# Allegro board 2019-08-16-s.brd
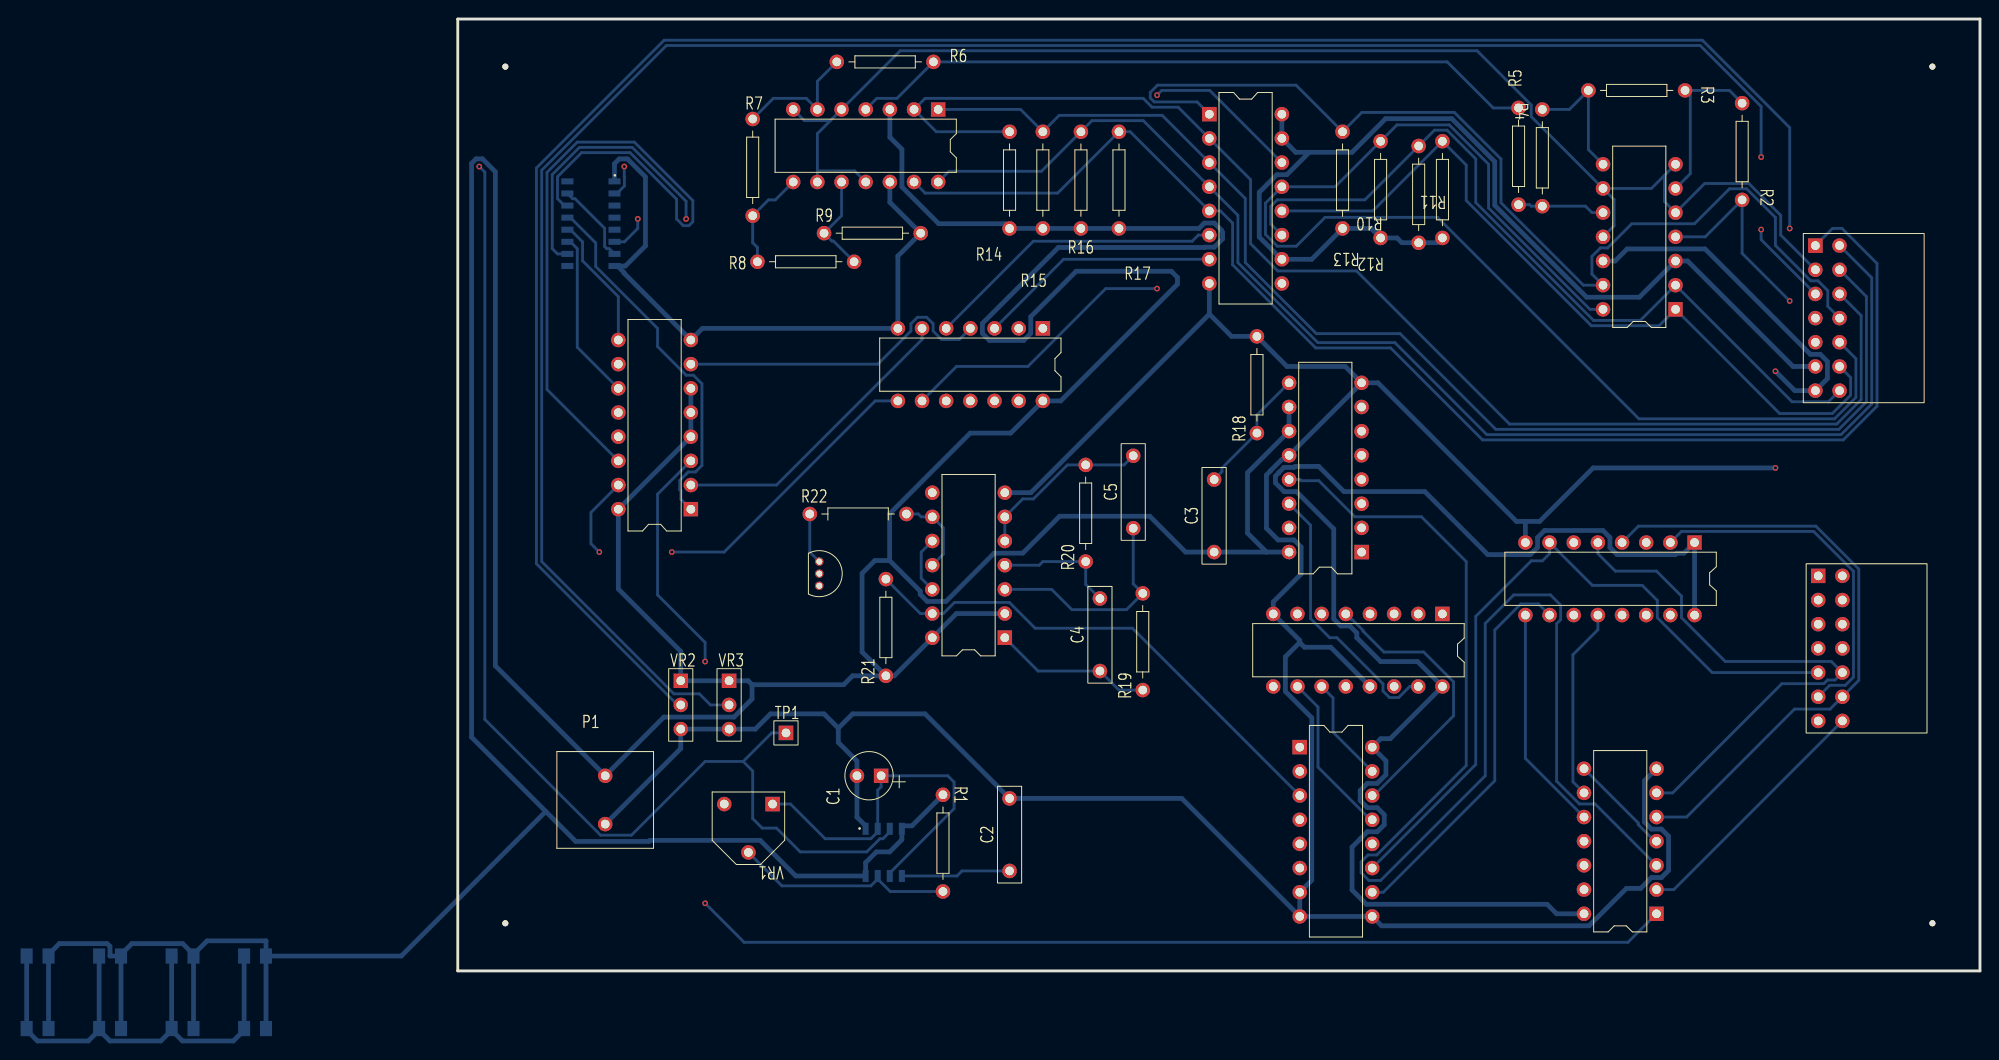
[diagram p0: board, top side]
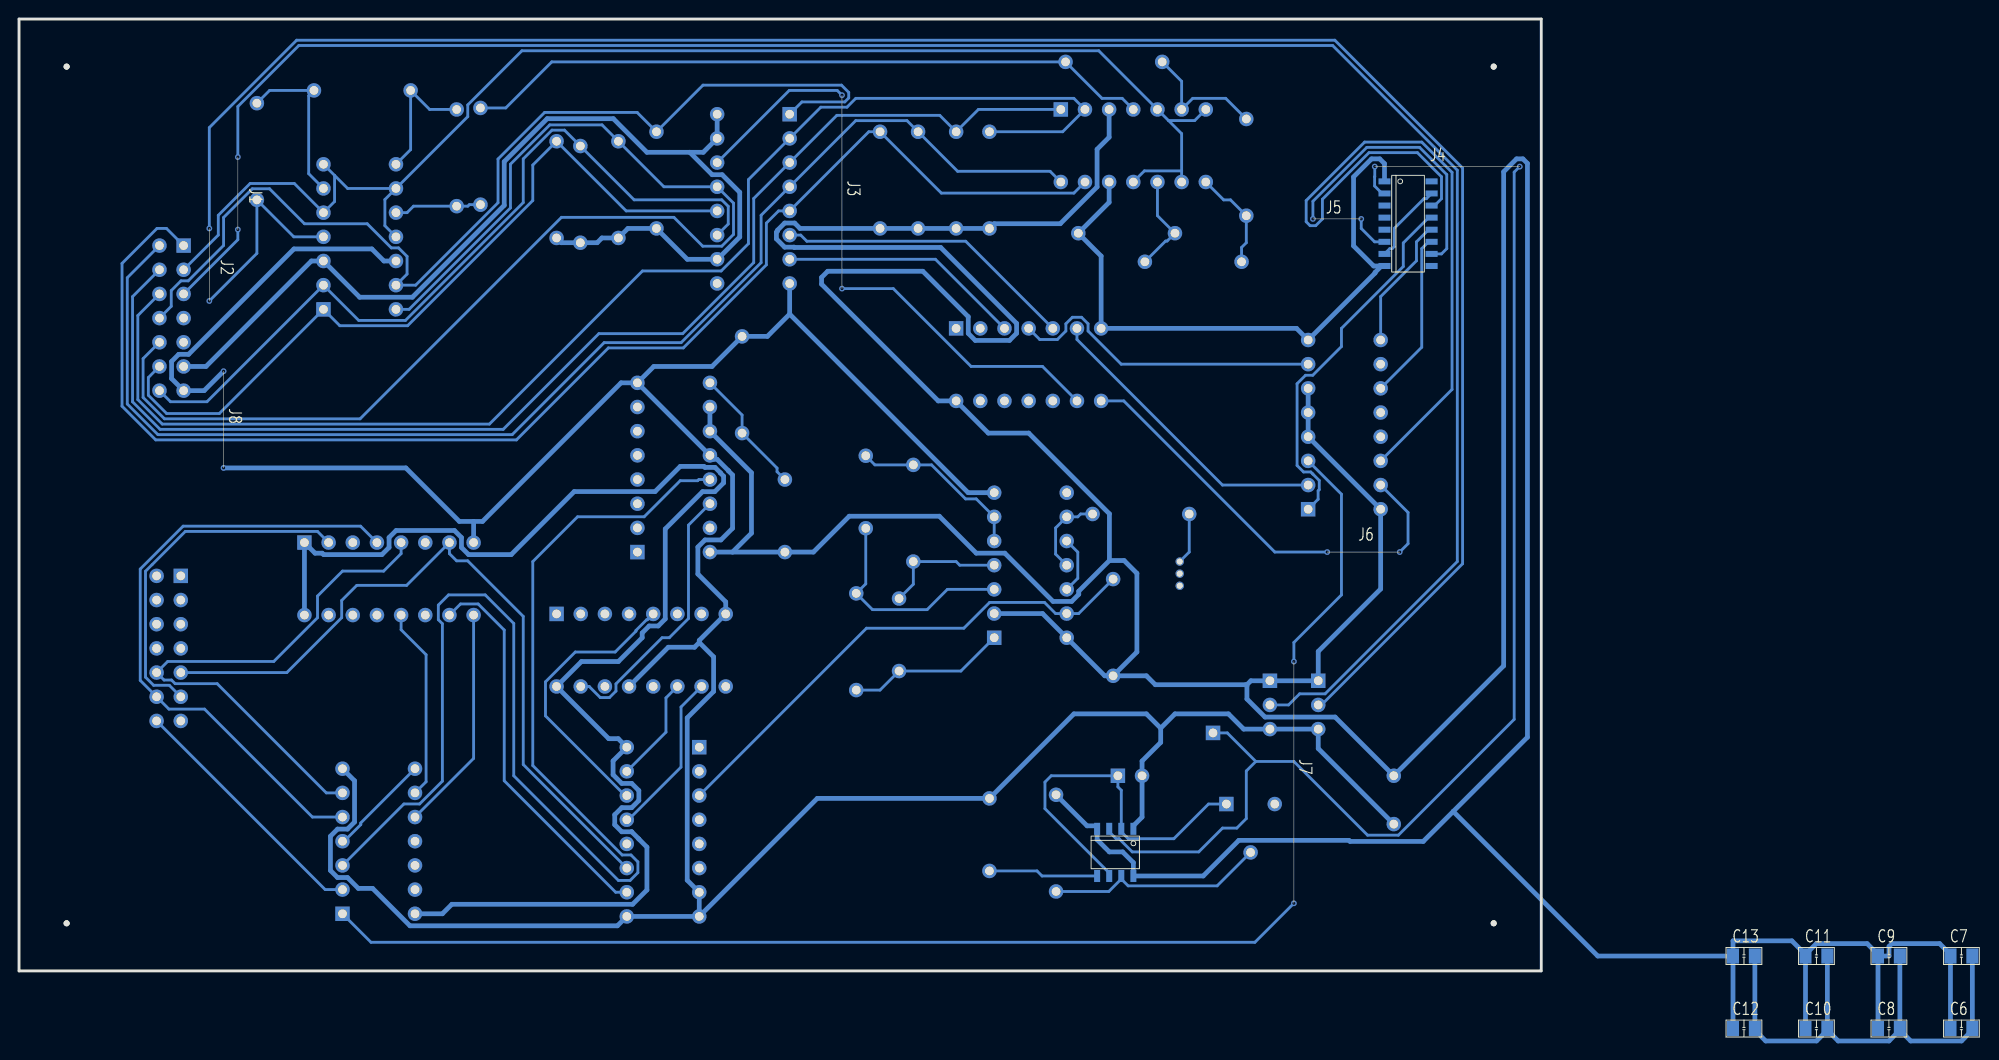
[diagram p1: board, bottom side, seen from below]

Outline 160 x 100 mm; copper layers: TOP, BOTTOM. Coordinates in mm from the lower left corner of the outline.
Outline path: 0,100 0,0 160,0 160,100 0,100

## Design rules (mm)
nets with their own width: min track width 0.5; nets +5V GND

## Placement (name value [footprint] x y rotation side)
C1  10uF  [CAP196]  44.5 20.5 90 top
C2  0.1uF  [CAP300]  58 10.5 90 top
C3  0.1uF  [CAP300]  79.5 44 90 top
C4  0.1uF  [CAP300]  67.5 31.5 90 top
C5  0.1uF  [CAP300]  71 46.5 90 top
C6  0.1uF  [SMDCAP]  -43.16 -6.06 180 bottom
C7  0.1uF  [SMDCAP]  -43.16 1.56 180 bottom
C8  0.1uF  [SMDCAP]  -35.54 -6.06 180 bottom
C9  0.1uF  [SMDCAP]  -35.54 1.56 180 bottom
C10  0.1uF  [SMDCAP]  -27.92 -6.06 180 bottom
C11  0.1uF  [SMDCAP]  -27.92 1.56 180 bottom
C12  0.1uF  [SMDCAP]  -20.3 -6.06 180 bottom
C13  0.1uF  [SMDCAP]  -20.3 1.56 180 bottom
J1  -  [J2]  137 85.5 270 bottom
J2  -  [J2]  140 78 270 bottom
J3  -  [J7]  73.5 92 270 bottom
J4  -  [J5]  17.5 84.5 180 bottom
J5  -  [J1]  24 79 180 bottom
J6  -  [J2]  22.5 44 180 bottom
J7  -  [J9]  26 32.5 270 bottom
J8  -  [J3]  138.5 63 270 bottom
NOREF  -  [unnamed]  5 5 0 top
NOREF#2  -  [unnamed]  5 95 0 top
NOREF#3  -  [unnamed]  155 5 0 top
NOREF#4  -  [unnamed]  155 95 0 top
P1  CON2  [2P]  15.5 20.5 0 top
P2  CON14  [JUMPER14]  142.7 76.2 270 top
P3  CON14  [JUMPER14]  143 41.5 270 top
Q1  2SC1815  [TO92]  38 43 0 top
R1  10K  [RES400]  51 18.5 270 top
R2  10K  [RES400]  135 81 90 top
R3  10K  [RES400]  129 92.5 180 top
R4  10K  [RES400]  114 90.5 270 top
R5  10K  [RES400]  111.5 80.5 90 top
R6  10K  [RES400]  50 95.5 180 top
R7  10K  [RES400]  31 89.5 270 top
R8  10K  [RES400]  31.5 74.5 0 top
R9  10K  [RES400]  38.5 77.5 0 top
R10  10K  [RES400]  101 76.5 90 top
R11  10K  [RES400]  103.5 77 90 top
R12  10K  [RES400]  97 77 90 top
R13  10K  [RES400]  93 78 90 top
R14  10K  [RES400]  58 78 90 top
R15  10K  [RES400]  61.5 78 90 top
R16  10K  [RES400]  65.5 78 90 top
R17  10K  [RES400]  69.5 78 90 top
R18  10K  [RES400]  84 56.5 90 top
R19  10K  [RES400]  72 29.5 90 top
R20  10K  [RES400]  66 43 90 top
R21  10K  [RES400]  45 31 90 top
R22  10K  [RES400]  37 48 0 top
TP1  TP  [JUMPER1]  34.5 25 0 top
U1  NE555  [SOIC8]  44.78 12.45 270 bottom
U2  LM339  [DIP14_3]  128 69.5 180 top
U3  LM339  [DIP14_3]  50.5 90.5 270 top
U4  40147  [DIP16_3]  79 90 0 top
U5  4069  [DIP14_3]  61.5 67.5 270 top
U6  4518  [SOIC16]  14 78.5 180 bottom
U7  4585  [DIP16_3]  24.5 48.5 180 top
U8  4027  [DIP16_3]  95 44 180 top
U9  4071  [DIP14_3]  126 6 180 top
U10  4001  [DIP14_3]  57.5 35 180 top
U11  4017  [DIP16_3]  103.5 37.5 270 top
U12  4051  [DIP16_3]  88.5 23.5 0 top
U13  4175  [DIP16_3]  130 45 270 top
VR1  1M  [VR1]  33.09 17.53 180 top
VR2  10K  [VR2]  23.44 27.94 0 top
VR3  10K  [VR2]  28.52 27.94 0 top

## Library data of the parts
C1 = Cap POL
C2-C5 = Cap NP
C6-C13 = Cap TEXT
J1-J8 = JUMPER
P1 = CON2
P2 P3 = CON14
Q1 = 2SC1815
R1-R22 = resistor
TP1 = TP
U1 = NE555: Tolerance: ***; User Part Number: ***
U2 U3 = LM339: Tolerance: ***; User Part Number: ***
U4 = 40147: Tolerance: ***; User Part Number: ***
U5 = 4069: Tolerance: ***; User Part Number: ***
U6 = 4518: Tolerance: ***; User Part Number: ***
U7 = 4585: Tolerance: ***; User Part Number: ***
U8 = 4027: Tolerance: ***; User Part Number: ***
U9 = 4071: Tolerance: ***; User Part Number: ***
U10 = 4001: Tolerance: ***; User Part Number: ***
U11 = 4017: Tolerance: ***; User Part Number: ***
U12 = 4051: Tolerance: ***; User Part Number: ***
U13 = 4175: Tolerance: ***; User Part Number: ***
VR1 = VR1
VR2 VR3 = VR2_0

## Footprints (pads in the part's own frame, mm; a bottom-side part is the same pattern mirrored in y, then rotated)
2P
  round 1.524 hole 0.914: 1(0,0) 2(0,-5.08)
CAP196
  rect 1.524x1.524 hole 0.914: 1(0,0)
  round 1.524 hole 0.914: 2(0,2.54)
CAP300
  round 1.524 hole 0.914: 1(0,0) 2(7.62,0)
DIP14_3
  rect 1.524x1.524 hole 0.914: 1(0,0)
  round 1.524 hole 0.914: 2(0,-2.54) 3(0,-5.08) 4(0,-7.62) 5(0,-10.16) 6(0,-12.7) 7(0,-15.24) 8(7.62,-15.24) 9(7.62,-12.7) 10(7.62,-10.16) 11(7.62,-7.62) 12(7.62,-5.08) 13(7.62,-2.54) 14(7.62,0)
DIP16_3
  rect 1.524x1.524 hole 0.914: 1(0,0)
  round 1.524 hole 0.914: 2(0,-2.54) 3(0,-5.08) 4(0,-7.62) 5(0,-10.16) 6(0,-12.7) 7(0,-15.24) 8(0,-17.78) 9(7.62,-17.78) 10(7.62,-15.24) 11(7.62,-12.7) 12(7.62,-10.16) 13(7.62,-7.62) 14(7.62,-5.08) 15(7.62,-2.54) 16(7.62,0)
JUMPER1
  rect 1.524x1.524 hole 0.914: 1(0,0)
JUMPER14
  rect 1.524x1.524 hole 0.914: 1(0,0)
  round 1.524 hole 0.914: 2(0,2.54) 3(2.54,0) 4(2.54,2.54) 5(5.08,0) 6(5.08,2.54) 7(7.62,0) 8(7.62,2.54) 9(10.16,0) 10(10.16,2.54) 11(12.7,0) 12(12.7,2.54) 13(15.24,0) 14(15.24,2.54)
RES400
  round 1.524 hole 0.914: 1(0,0) 2(10.16,0)
SMDCAP
  rect 1.27x1.6 smd: 1(-0.15,0) 2(2.15,0)
SOIC8
  rect 1.27x0.635 smd: 1(-2.477,1.905) 2(-2.477,0.635) 3(-2.477,-0.635) 4(-2.477,-1.905) 5(2.477,-1.905) 6(2.477,-0.635) 7(2.477,0.635) 8(2.477,1.905)
SOIC16
  rect 1.27x0.635 smd: 1(-2.477,4.445) 2(-2.477,3.175) 3(-2.477,1.905) 4(-2.477,0.635) 5(-2.477,-0.635) 6(-2.477,-1.905) 7(-2.477,-3.175) 8(-2.477,-4.445) 9(2.477,-4.445) 10(2.477,-3.175) 11(2.477,-1.905) 12(2.477,-0.635) 13(2.477,0.635) 14(2.477,1.905) 15(2.477,3.175) 16(2.477,4.445)
TO92
  round 0.889 hole 0.635: 1(0,0) 2(0,-1.27) 3(0,-2.54)
unnamed
  round 0.635 hole 3.175 unplated: (0,0)
VR1
  rect 1.524x1.524 hole 0.914: 1(0,0)
  round 1.524 hole 0.914: 2(2.54,5.08) 3(5.08,0)
VR2
  rect 1.524x1.524 hole 0.914: 1(0,2.54)
  round 1.524 hole 0.914: 2(0,0) 3(0,-2.54)

## Nets
+5V: C3.1 C6.1 C7.1 C8.1 C9.1 C10.1 C11.1 C12.1 C13.1 P1.1 P2.11 R1.1 R10.1 R11.1 R12.1 R13.1 R14.1 R15.1 R16.1 R17.1 R21.1 U1.4(RST) U1.8(VCC) U2.3 U3.3 U4.10(I\9\) U4.15(I\0\) U4.16(VCC) U5.14 U6.16 U7.4(A>BIN) U7.5(A<BIN) U7.6(A=BIN) U7.16(VCC) U8.10(J) U8.11(K) U8.16 U9.14 U10.2(I1) U10.14 U11.16(VCC) U12.16(VCC) U13.1(R\S\T\) U13.16(VCC) VR2.1(A) VR3.1(A)
GND: C1.2 C2.2 C6.2 C7.2 C8.2 C9.2 C10.2 C11.2 C12.2 C13.2 P1.2 P2.13 R9.2 R18.2 U1.1(GND) U2.12 U3.12 U4.8(GND) U5.7 U6.1(CLK) U6.8 U6.9(CLK) U7.8(GND) U8.8 U8.12(RST) U9.7 U10.7 U11.8(GND) U11.13(C\K\E\N\) U12.7(VEE) U12.8(GND) U12.9(C) U13.8(GND) VR2.3(WIPER) VR3.3(WIPER)
ADC0: P2.14 R10.2 U2.2(OUT) U4.11(I\1\)
ADC1: P2.12 R11.2 U2.1(OUT) U4.12(I\2\)
ADC2: P2.10 R12.2 U2.14(OUT) U4.13(I\3\)
ADC3: P2.8 R13.2 U2.13(OUT) U4.1(I\4\)
ADC4: P2.6 R14.2 U3.2(OUT) U4.2(I\5\)
ADC5: P2.4 R15.2 U3.1(OUT) U4.3(I\6\)
ADC6: P2.2 R16.2 U3.14(OUT) U4.4(I\7\)
ADC7: P2.1 R17.2 U3.13(OUT) U4.5(I\8\)
CLK: TP1.1 U1.3(OUT) U6.2(EN)
MOTOR-GND: P3.6 Q1.2(C)
MR: U6.7(CLR) U6.15(CLR) U8.14(Q\) U11.15(RST) U12.6(E\N\)
MR2: P3.13 U8.15(Q)
SW1: P3.14 U9.2(I1)
SW2: P3.12 U9.5(I0) U13.4(D0)
SW3: P3.10 U9.6(I1) U13.5(D1)
SW4: P3.8 U9.9(I1) U13.12(D2)
SWLED1: P3.11 U13.2(Q0)
SWLED2: P3.9 U12.11(A) U13.7(Q1)
SWLED3: P3.7 U12.10(B) U13.10(Q2)
VR3: P2.5 VR3.2(B)
VR-LED: P2.3 U2.5(+IN) U2.7(+IN) U2.9(+IN) U2.11(+IN) U3.5(+IN) U3.7(+IN) U3.9(+IN) U3.11(+IN)
N01821: R1.2 U1.7(DISC) VR1.2
N01825: C1.1 U1.2(TRIG) U1.6(THR) VR1.1
N01879: R2.2 R3.1 U2.6(-IN)
N01886: R2.1 U2.4(-IN) VR2.2(B)
N01929: R3.2 R4.1 U2.8(-IN)
N02004: R4.2 R5.1 U2.10(-IN)
N02079: R5.2 R6.1 U3.4(-IN)
N02154: R6.2 R7.1 U3.6(-IN)
N02229: R7.2 R8.1 U3.8(-IN)
N02304: R8.2 R9.1 U3.10(-IN)
N05133: U4.9(A\) U5.1(I)
N05160: U4.7(B\) U5.3(I)
N05172: U4.6(C\) U5.5(I)
N05184: U4.14(D\) U5.9(I)
N05202: U5.2(O) U7.10(A0)
N05214: U5.4(O) U7.7(A1)
N05226: U5.6(O) U7.2(A2)
N05238: U5.8(O) U7.15(A3)
N05506: U6.6(Q3) U6.10(EN)
N05615: U6.11(Q0) U7.11(B0)
N05627: U6.12(Q1) U7.9(B1)
N05639: U6.13(Q2) U7.1(B2)
N05651: U6.14(Q3) U7.14(B3)
N05837: C2.1 U1.5(CV)
N06039: U7.3(A=BOUT) U9.1(I0)
N06118: U8.13(CLK) U9.3(O)
N06347: C3.2 R18.1 U8.9(SET)
N12761: Q1.1(E) R22.1
N12765: Q1.3(B)
N12791: R22.2 U10.9(I1) U10.11(O)
N12870: U10.10(O) U10.12(I0)
N12949: R21.2 U10.13(I1) U12.3(X)
N13065: U9.4(O) U9.8(I0)
N13106: U9.10(O) U13.9(CLK)
N16220: U10.8(I0) U11.3(0)
N16266: U11.10(4) U12.13(X0)
N16278: U11.5(6) U12.14(X1)
N16290: U11.11(9) U12.15(X2)
N16648: C5.1 R19.2 U10.3(O)
N16662: C5.2 R20.2 U10.5(I0) U10.6(I1)
N16697: C4.1 R19.1 U10.1(I0)
N16721: C4.2 R20.1 U10.4(O) U11.14(CLK)

Pads without a net: P2 7 9; P3 1 2 3 4 5; U5 10 11 12 13; U6 3 4 5; U7 12 13; U8 1 2 3 4 5 6 7; U9 11 12 13; U11 1 2 4 6 7 9 12; U12 1 2 4 5 12; U13 3 6 11 13 14 15; VR1 3

## Via types
v1: diameter 0.61, hole 0.33, TOP to BOTTOM, 16 vias

## Routing (per net, layer and track width the routed paths; a pad name or vN(x,y) marks a point on that pad's centre or on a via; arc(x,y) is an arc through that point)
+5V: length 870.6
  BOTTOM w0.5: U7.6 U7.5 U7.4 U7.16 16.88,40.12 23.44,33.56 VR2.1 VR3.1 30.52,30.48 31,30 ; 9.25,16.75 12.4,13.6 20.1,13.6 20.21,13.71 31.79,13.71 35.53,9.97 U1.8 42.87,11.37 44,12.5 45.4,12.5 46.68,13.78 46.68,15.24 47.74,15.24 R1.1 ; 9.25,16.75 1.45,24.55 1.45,84.84 1.92,85.31 2.6,85.31 3.95,83.95 3.95,32.05 P1.1 21.67,26.67 29.04,26.67 30.94,28.56 30.94,29.94 31,30 ; 9.25,16.75 -5.94,1.56 C13.1 ; C9.1 -36.55,1.56 -36.55,2.57 -36.85,2.86 -41.88,2.86 -43.01,1.73 C7.1 C6.1 ; C9.1 C8.1 ; C9.1 -35.39,1.73 -34.26,2.86 -28.91,2.86 -27.77,1.73 ; U13.16 U13.1 128.88,43.88 128.13,43.88 127.98,43.73 121.86,43.73 121.11,44.48 121.11,45.52 120.36,46.27 114.24,46.27 113.49,45.52 113.49,44.48 112.74,43.73 108.27,43.73 101.65,50.35 93.15,50.35 90.5,53 88.01,53 87.9,52.89 86.84,52.89 86.27,52.33 86.27,52.3 85.94,51.97 85.94,51.27 86.86,50.35 88.15,50.35 92.07,46.43 92.07,36.98 92.82,36.23 93.77,36.23 94.5,35.5 94.5,35 97,32.5 100.88,32.5 U11.16 98.02,24.4 97.02,24.4 U12.16 97.56,22.06 97.56,20.61 96.64,19.69 95.6,19.69 94.85,18.94 94.85,17.9 95.6,17.15 96.64,17.15 97.39,16.4 97.39,15.36 96.64,14.61 95.61,14.61 95.61,14.61 95.6,14.61 94.85,13.86 94.85,13.85 94,13 94,8.5 95.51,6.99 114.51,6.99 115.5,6 U9.14 ; -27.77,1.73 C11.1 C10.1 ; -27.77,1.73 -26.35,3.15 -20.15,3.15 C13.1 ; 31,30 31.06,30.06 40.56,30.06 41.5,31 R21.1 ; C13.1 C12.1 ; P2.11 140.35,63.5 129.27,74.58 U2.3 124.19,70.77 118.65,70.77 109,80.43 109,85.02 104.48,89.53 97.53,89.53 94,86 89.5,86 ; 89.5,86 87.15,83.65 86.1,83.65 84.25,81.8 84.25,77.1 86.59,74.76 U4.10 89.76,74.76 R13.1 96,78 R12.1 98.73,77 99.23,76.5 R10.1 103,76.5 R11.1 ; 89.5,86 88.08,86 U4.15 U4.16 ; R21.1 42.5,33.5 42.5,41.77 43.84,43.11 45.39,43.11 ; R21.1 45.88,31 U10.14 52.42,37.54 U10.2 ; 85,44 C3.1 76.5,44 72.73,47.77 63.27,47.77 59.39,43.89 56.39,43.89 51.31,38.81 49.36,38.81 48.61,39.56 48.61,39.89 45.39,43.11 ; 85,44 83.01,45.99 83.01,52.33 U8.11 U8.10 ; 85,44 U8.16 ; U3.3 45.42,87.58 46.69,86.31 46.69,82.36 50.55,78.5 57.5,78.5 R14.1 R15.1 R16.1 R17.1 77.91,78 78.48,78.57 79.52,78.57 80.27,77.82 80.27,77.73 80.39,77.61 80.39,76.9 79.52,76.03 78.53,76.03 78.5,76 63.12,76 55.15,68.02 55.15,66.98 55.9,66.23 59.48,66.23 60.23,66.98 60.23,68.73 65,73.5 75,73.5 75.65,72.85 75.65,72.15 63.38,59.88 U5.14 58.12,56.5 53.87,56.5 45.39,48.02 45.39,43.11
GND: length 500.6
  BOTTOM w0.5: C11.2 C10.2 -30.07,-6.23 ; v1(138.5,52.84) 119.34,52.84 113.72,47.22 112.22,47.22 ; 40,25.5 38.5,27 32.88,27 31.28,25.4 VR3.3 VR2.3 23.44,23.36 P1.2 ; 40,25.5 41.5,27 49.12,27 C2.2 76.1,18.12 U12.8 ; 40,25.5 40,24 41.96,22.04 C1.2 41.96,16.15 42.87,15.24 U1.1 ; U12.8 U12.7 89.77,9.53 89.77,26.58 86.99,29.36 86.99,32.99 88.5,34.5 ; U12.8 U12.9 97.11,4.73 118.9,4.73 122.84,8.66 124.33,8.66 125.48,9.81 126.52,9.81 127.27,10.55 127.27,14.14 126.52,14.89 125.48,14.89 124.73,15.64 124.73,19.97 U9.7 ; U6.8 16.79,74.06 ; 16.79,74.06 17.62,74.06 19.73,76.17 19.73,83.42 17.84,85.31 16.98,85.31 16.48,84.81 U6.1 ; 16.79,74.06 17.47,73.38 17.47,73.31 U7.8 25.72,67.5 U5.7 46.26,75.1 R9.2 45.42,80.74 U3.12 ; U2.12 121.65,74.58 122.91,75.85 131.1,75.85 142.18,64.77 143.22,64.77 143.97,64.02 143.97,62.23 P2.13 140.54,60.96 v1(138.5,63) ; 88.5,34.5 89,34 91.76,34 U11.13 ; 88.5,34.5 88.5,34.72 U11.8 85.72,38.77 88.65,41.69 88.65,44.52 87.9,45.27 86.23,45.27 85,46.5 85,52.1 85.43,52.53 85.43,52.55 86.63,53.75 86.97,53.75 U8.12 U8.8 ; 79,69 81.34,66.66 R18.2 87.16,63.5 93.28,63.5 U8.8 ; 79,69 60.24,50.24 U10.7 ; 79,69 U4.8 ; 112.22,47.22 U13.8 ; 112.22,47.22 111.28,47.22 96.72,61.78 U8.8 ; -30.07,-6.23 -31.21,-7.36 -36.55,-7.36 -37.69,-6.23 ; -30.07,-6.23 -28.93,-7.36 -23.59,-7.36 -22.45,-6.23 C12.2 C13.2 ; -37.69,-6.23 C8.2 C9.2 ; -37.69,-6.23 -38.83,-7.36 -44.17,-7.36 -45.31,-6.23 C6.2 C7.2
ADC0: length 84.7
  BOTTOM w0.3: U4.11 85.45,78.47 85.45,80.32 86.14,81.01 95.35,81.01 R10.2 102.67,88.33 103.98,88.33 107,85.31 107,80.72 119.38,68.33 124.29,68.33 U2.2 140.25,59.79 144.07,59.79 P2.14
ADC1: length 82.6
  BOTTOM w0.3: U4.12 96.18,79.84 R11.2 106,84.66 106,80.93 119.15,67.78 126.28,67.78 U2.1 138.95,58.55 144.48,58.55 146.41,60.48 146.41,62.33 P2.12
ADC2: length 132.9
  BOTTOM w0.3: P2.10 146.96,64.32 146.96,60.25 144.71,58 124.15,58 102.98,79.17 91.17,79.17 88.13,76.13 86.14,76.13 84.9,77.37 84.9,80.66 U4.13 92.22,82.38 R12.2 98.72,88.88 104.21,88.88 108.35,84.75 108.35,80.16 119,69.5 U2.14
ADC3: length 109.3
  BOTTOM w0.3: P2.8 144,69.82 144,71.47 142.97,72.49 142.22,72.49 138.5,76.21 138.5,79.15 135.48,82.17 133.67,82.17 129.99,78.49 123.4,78.49 120.86,75.95 120.11,75.95 119.21,75.06 119.21,73.21 U2.13 118.31,72.04 109.65,80.7 109.65,85.29 104.75,90.19 95.03,90.19 R13.2 88.11,93.05 73.55,93.05 72.79,92.29 72.79,91.71 73.21,91.29 77.71,91.29 U4.1
ADC4: length 142.3
  BOTTOM w0.3: P2.6 147.51,68.85 147.51,60.02 144.94,57.45 110.55,57.45 94.47,73.53 86.2,73.53 83.33,76.4 83.33,83.13 U4.2 75.72,90.74 72.98,90.74 72.05,91.67 49.13,91.67 U3.2 50.3,88.16 R14.2
ADC5: length 133.1
  BOTTOM w0.3: P2.4 148.07,70.83 148.07,59.79 145.17,56.89 109.11,56.89 99.05,66.95 90.25,66.95 82.78,74.41 82.78,81.14 U4.3 74.04,89.88 63.22,89.88 R15.2 59.16,90.5 U3.1
ADC6: length 136.7
  BOTTOM w0.3: P2.2 148.62,72.82 148.62,59.56 145.4,56.34 108.16,56.34 98.5,66 90.41,66 82,74.41 82,79.38 U4.4 72.05,89.33 66.67,89.33 R16.2 61.34,84 51.62,84 U3.14
ADC7: length 145.6
  BOTTOM w0.3: U3.13 49.13,81.71 63.05,81.71 R17.2 70.68,88.16 U4.5 80.17,79.84 81.45,78.56 81.45,74.18 90.18,65.45 98.05,65.45 107.72,55.78 145.63,55.78 149.18,59.33 149.18,74.32 145.5,78 144.5,78 P2.1
CLK: length 126.3
  BOTTOM w0.3: TP1.1 33,25 30,22 ; U1.3 45.41,14.61 44.69,13.88 44.37,13.88 42.99,12.5 36,12.5 33.5,15 32,15 31,16 31,21 30,22 ; v1(17.5,84.5) 17.5,83.45 17.52,83.43 17.52,82.46 16.73,81.67 U6.2 ; v1(2.26,84.5) 2.85,83.91 2.85,26.43 15.02,14.25 18.25,14.25 26,22 30,22
MR: length 37.4
  BOTTOM w0.3: U8.14 89.63,46.83 89.63,37.02 91.65,35 92.41,35 97.25,30.16 97.25,29.4 97.94,28.71 98.9,28.71 100.07,29.88 U11.15 ; U6.7 15.93,75.87 15.67,75.87 15.44,76.11 15.44,78.01 12.33,81.13 12.07,81.13 U6.15
SW1: length 26.9
  BOTTOM w0.3: U9.2 127.82,8.54 P3.14
SW2: length 66.4
  BOTTOM w0.3: U9.5 129.16,16.16 140.5,27.5 144.24,27.5 P3.12 147.26,30.52 147.26,42.21 142.75,46.72 124.1,46.72 U13.4
SW3: length 58.1
  BOTTOM w0.3: U9.6 127.7,18.7 139.17,30.17 143.59,30.17 143.97,30.55 144.75,30.55 P3.10 144.37,32.51 133.22,32.51 128.63,37.1 128.63,39.37 126,42 121.67,42 119.84,43.83 U13.5
SW4: length 20.3
  BOTTOM w0.3: U13.12 119.84,35.84 117.21,33.21 117.21,19.87 U9.9
SWLED1: length 37.1
  BOTTOM w0.3: P3.11 144.2,30 145.85,30 146.71,30.86 146.71,41.98 146.02,42.67 142.52,46.17 128.63,46.17 U13.2
SWLED2: length 77.6
  BOTTOM w0.3: P3.9 131.85,31.34 126.09,37.1 126.09,38.91 124.5,40.5 119.26,40.5 U13.7 114.76,43.83 114.01,43.08 112.84,43.08 107,37.24 107,21.68 U12.11
SWLED3: length 40.9
  BOTTOM w0.3: U12.10 97.29,8.26 109,19.97 109,35.81 111.74,38.55 113.59,38.55 U13.10
VR3: length 217.7
  BOTTOM w0.3: v1(137,85.5) 137,90.81 130.59,97.22 21.92,97.22 8.82,84.12 8.82,43 22.72,29.11 25.39,29.11 26.56,27.94 VR3.2 ; v1(137,77.88) 137,76.82 P2.5
VR-LED: length 148
  BOTTOM w0.3: P2.3 139.05,77.31 139.05,79.38 135.71,82.72 131.06,82.72 U2.5 126.83,80.83 126.83,83.57 ; U2.9 125.46,82.2 126.83,83.57 ; U2.9 112.83,89.75 112.83,90.97 107.14,96.67 46.51,96.67 U3.5 39.17,89.33 ; U2.9 121.55,81.03 121.55,78.29 U2.11 ; 126.83,83.57 U2.7 ; 39.17,89.33 36.43,89.33 U3.7 ; 39.17,89.33 37.8,87.96 37.8,84.05 ; U3.11 41.71,84.05 37.8,84.05 ; 37.8,84.05 U3.9
N01821: length 23.1
  BOTTOM w0.3: R1.2 45.45,8.34 44.14,9.65 ; 44.14,9.65 44.14,9.97 ; 44.14,9.65 43.42,8.93 34.07,8.93 VR1.2
N01825: length 39.5
  BOTTOM w0.3: U1.6 45.41,10.29 52.17,17.04 52.17,19.83 51.5,20.5 C1.1 44.5,19.33 44.14,18.98 44.14,14.61 43.42,13.88 38.62,13.88 34.97,17.53 VR1.1
N01879: length 17.7
  BOTTOM w0.3: U2.6 129.55,83.75 129.55,91.95 R3.1 133.66,92.5 R2.2
N01886: length 235.9
  BOTTOM w0.3: VR2.2 23.1,27.94 8.27,42.77 8.27,84.35 21.69,97.77 130.82,97.77 140,88.59 v1(140,78) ; U2.4 131.12,77.12 R2.1 135,75.38 v1(140,70.38)
N01929: length 14.1
  BOTTOM w0.3: R4.1 116.84,90.5 R3.2 118.84,86.28 U2.8
N02004: length 9.2
  BOTTOM w0.3: R5.1 112.67,80.5 112.83,80.34 R4.2 118.53,80.34 119.21,79.66 U2.10
N02079: length 72.7
  BOTTOM w0.3: U3.4 44.05,91.67 46.17,91.67 R6.1 104,95.5 108.84,90.66 R5.2
N02154: length 14
  BOTTOM w0.3: R7.1 33.17,91.67 36.63,91.67 U3.6 37.8,93.46 R6.2
N02229: length 10.8
  BOTTOM w0.3: U3.8 33.38,81 32.66,81 R7.2 31,76.5 31.5,76 R8.1
N02304: length 10.5
  BOTTOM w0.3: U3.10 40.34,79.34 R9.1 39.32,76.68 39.48,76.68 R8.2
N05160: length 25.6
  BOTTOM w0.3: U4.7 63.68,74.76 U5.3
N05172: length 31.7
  BOTTOM w0.3: U4.6 77.83,77.3 77.19,76.65 60.49,76.65 U5.5
N05184: length 46.1
  BOTTOM w0.3: v1(73.5,92) 74,92.5 79.04,92.5 U4.14 ; U5.9 52.42,63.5 59.92,63.5 68.1,71.68 v1(73.5,71.68)
N05214: length 33.8
  BOTTOM w0.3: U5.4 52.71,66.33 50.86,66.33 49.97,67.22 49.97,67.98 49.28,68.67 48.32,68.67 47.63,67.98 47.63,67.22 44.15,63.74 U7.7
N05226: length 31.8
  BOTTOM w0.3: U7.2 33.51,51.04 48.8,66.33 U5.6
N05238: length 38.9
  BOTTOM w0.3: v1(22.5,44) 28,44 43.88,59.88 U5.8 ; v1(14.88,44) 14,44.88 14,48.16 U7.15
N05506: length 33.1
  BOTTOM w0.3: U6.10 10.48,75.33 9.93,75.88 9.93,83.66 12.79,86.52 18.34,86.52 24,80.85 v1(24,79) ; v1(18.92,79) 18.92,78 17.52,76.59 U6.6
N05615: length 17.8
  BOTTOM w0.3: U7.11 12.56,65.52 12.56,75.87 11.84,76.59 U6.11
N05627: length 14
  BOTTOM w0.3: U7.9 16.88,70.84 13.12,74.6 13.12,76.59 11.84,77.86 U6.12
N05639: length 39
  BOTTOM w0.3: U7.1 23.45,49.55 23.45,50.44 23.33,50.56 23.33,51.52 24.02,52.21 24.23,52.41 24.98,52.41 25.67,53.1 25.67,61.68 24.77,62.57 24.02,62.57 21,65.59 21,67.5 14.5,74 14.5,76.48 11.84,79.14 U6.13
N05651: length 78.3
  BOTTOM w0.3: U6.14 11.21,80.41 10.48,81.13 10.48,83.43 13.02,85.96 18.11,85.96 23,81.07 23,79 23.71,78.29 24.29,78.29 24.71,78.71 24.71,80.93 18.57,87.07 12.56,87.07 9.38,83.89 9.38,61.08 U7.14
N05837: length 11.5
  BOTTOM w0.3: C2.1 53,10.5 52.47,9.97 46.68,9.97
N06039: length 127.5
  BOTTOM w0.3: U7.3 21,50.08 21,39.5 26,34.5 v1(26,32.5) ; U9.1 123,3 30.1,3 v1(26,7.1)
N06118: length 136.4
  BOTTOM w0.3: U8.13 88.55,51.62 88.67,51.5 90.5,51.5 94.29,47.71 101.29,47.71 106,43 106,21.57 96.6,12.17 95.67,12.17 94.95,11.45 94.95,10.32 95.77,9.5 97,9.5 108,20.5 108,36.5 111,39.5 114.85,39.5 115.93,38.43 115.93,36.9 115.5,36.47 115.5,19.93 117.9,17.53 119.55,17.53 U9.3
N06347: length 13.4
  BOTTOM w0.3: C3.2 80.32,52.44 80.32,52.82 R18.1 84,58.4 U8.9
N12761: length 5.4
  BOTTOM w0.3: Q1.1 37,44 R22.1
N12791: length 8.9
  BOTTOM w0.3: U10.11 51.05,43.79 51.05,46.53 U10.9 48.71,47.7 48.41,48 R22.2
N12870: length 6
  BOTTOM w0.3: U10.10 48.71,43.99 48.71,41.25 U10.12
N12949: length 53.9
  BOTTOM w0.3: U12.3 70.92,36 60.69,36 57.98,38.71 52.21,38.71 51.05,37.54 U10.13 48.62,37.54 R21.2
N13065: length 10.9
  BOTTOM w0.3: U9.8 124.08,15.54 124.08,15.36 125.82,13.62 U9.4
N13106: length 23.8
  BOTTOM w0.3: U13.9 112.22,22.32 U9.10
N16266: length 17.4
  BOTTOM w0.3: U12.13 95.94,15.88 90.42,21.4 90.42,27.72 U11.10
N16278: length 29.9
  BOTTOM w0.3: U12.14 96.3,18.42 104.67,26.79 104.67,30.36 101.53,33.5 97.34,33.5 95.15,35.69 95.15,35.77 94.04,36.89 93.95,36.89 U11.5
N16290: length 11.1
  BOTTOM w0.3: U11.11 92,28.68 92,25.08 U12.15
N16648: length 23.3
  BOTTOM w0.3: C5.1 71,40.66 R19.2 70.29,37.95 64.55,37.95 62.42,40.08 U10.3
N16662: length 18.7
  BOTTOM w0.3: U10.5 U10.6 59.39,49.59 60.51,49.59 64.08,53.16 R20.2 70.04,53.16 C5.2
N16697: length 16.8
  BOTTOM w0.3: R19.1 69.5,29.5 C4.1 61,31.5 U10.1
N16721: length 13.2
  BOTTOM w0.3: U10.4 61.12,42.62 61.5,43 R20.1 66,40.62 C4.2
